# Altium PCB ESP32SSMB V1.4 .PcbDoc (part 1 of 2)
Units mm, origin at the board's own origin, x right, y up, seen from the top; angles counter-clockwise.
Board outline 43.94 x 35.18 mm, 2 copper layers (Top Layer, Bottom Layer), stack 1.671 mm thick; 77 components, 65 nets, 278 pads, 383 vias.
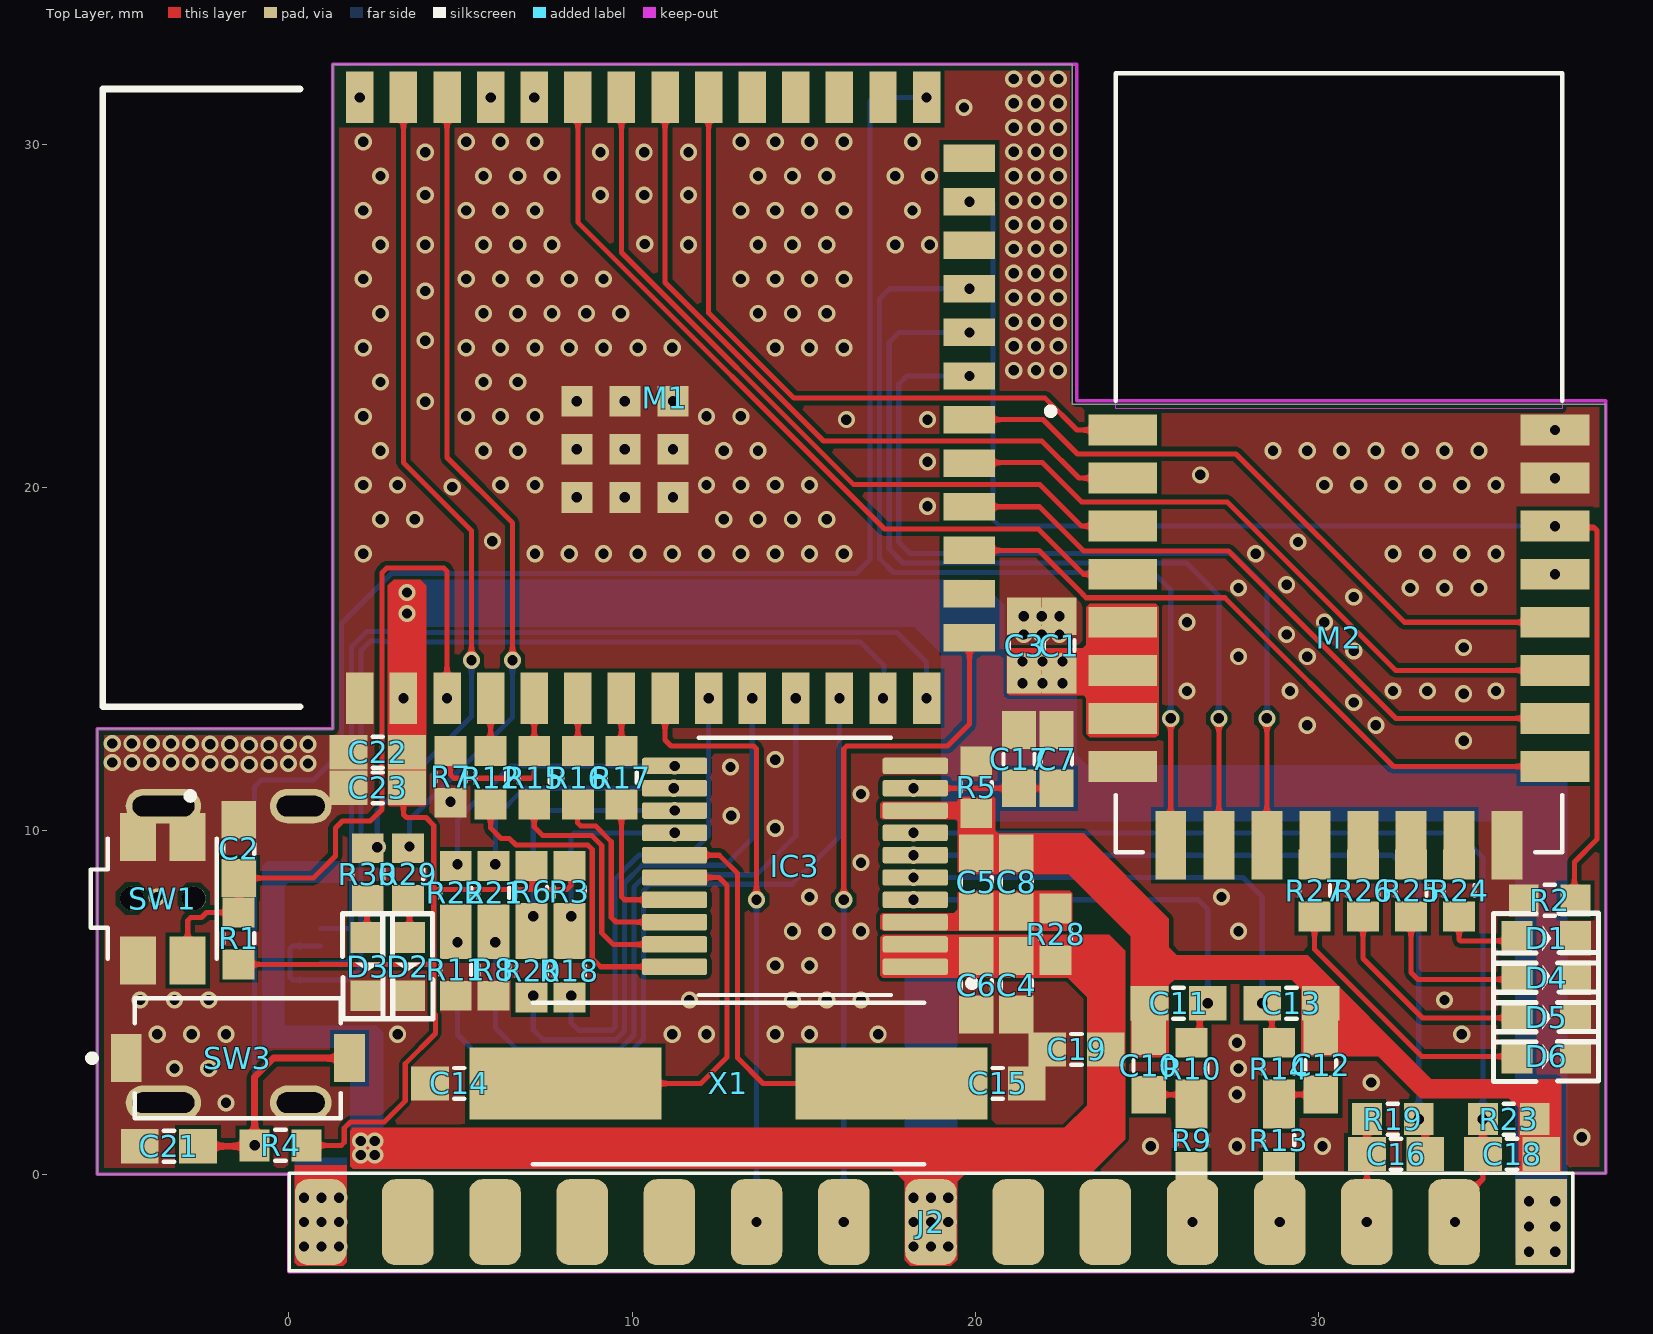
[diagram p0: Top Layer view]
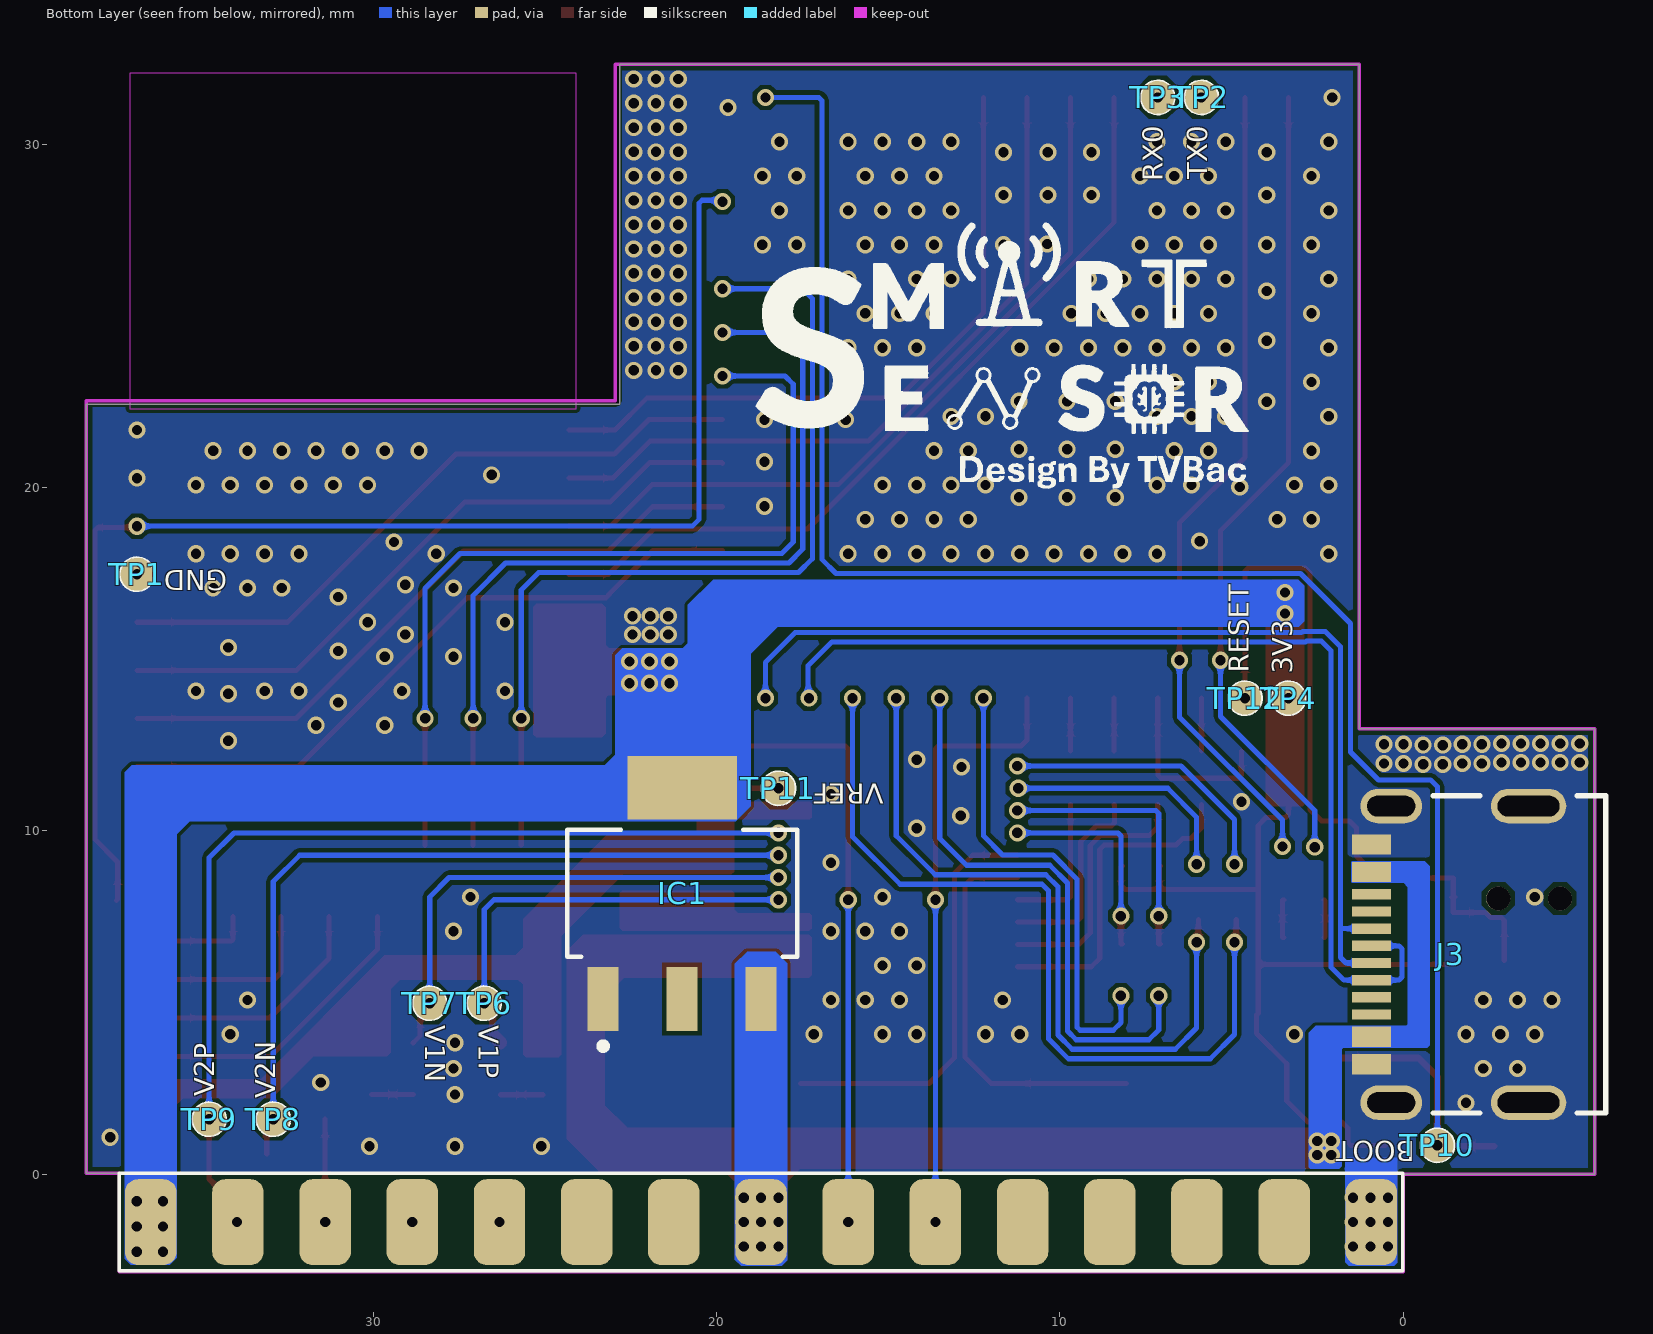
[diagram p1: Bottom Layer view, seen from below]
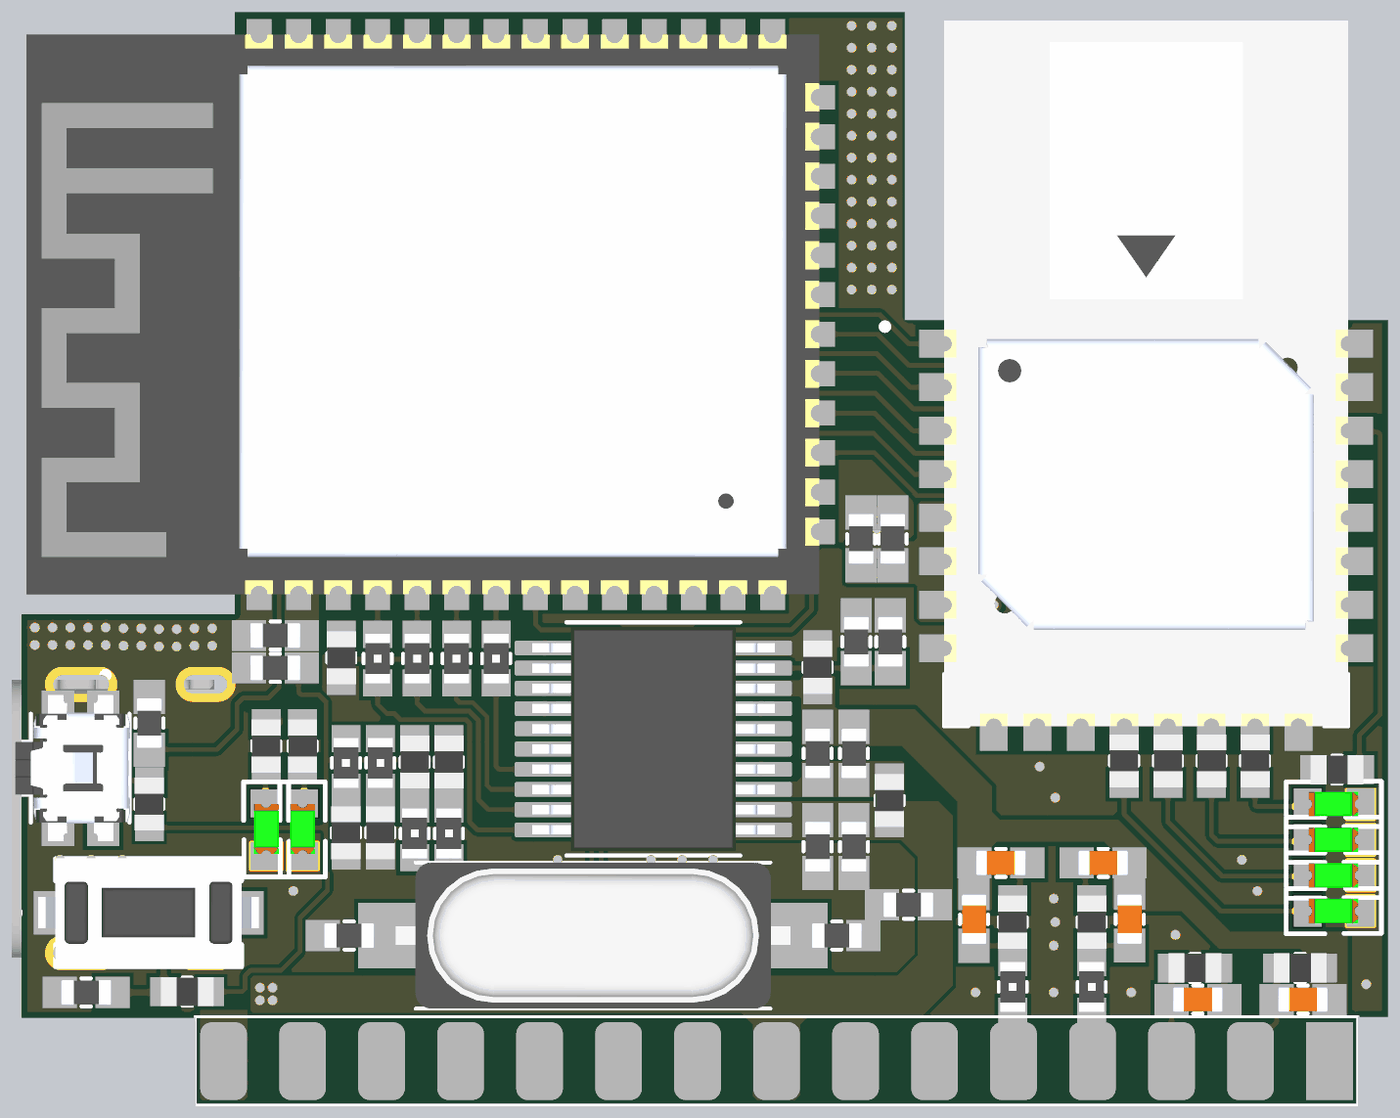
[diagram p2: 3D render of the assembled board from above, using the file's embedded part models]

## Layer stack, top to bottom
Top Solder: solder mask 0.0102, Solder Resist, Dk 3.5
Top Layer: signal copper 0.0356
Dielectric 1: dielectric 1.6, FR-4, Dk 4.3
Bottom Layer: signal copper 0.0356
Bottom Solder: solder mask 0.0102, Solder Resist, Dk 3.5

## Board outline
0.013,-2.845 0.013,0 -5.575,0 -5.575,12.979 1.283,12.979 1.283,32.334 22.823,32.334 22.823,22.432 38.367,22.432 38.367,0.025 37.402,0.025 37.402,-2.845

## Design rules (kind name [scope] priority, off if disabled: settings)
Clearance ClearancePower [InNetClass('POWER')] p1: gap=0.1 ignorepadtopadclearanceinfootprint=FALSE
Clearance [All] p2: gap=0.127 ignorepadtopadclearanceinfootprint=FALSE
ComponentClearance [All] p1: gap=0.1 collisioncheckmode=3 verticalgap=0.1 showdistances=FALSE
DiffPairsRouting [All] p1: maxlimit=2 minlimit=0.1 mostfreqgap=0.2 toplayer_minwidth=0.15 toplayer_maxwidth=2 toplayer_prefwidth=0.2 bottomlayer_minwidth=0.15 bottomlayer_maxwidth=2 bottomlayer_prefwidth=0.2 maxuncoupledlength=12.7
HoleToHoleClearance [All] p1: gap=0 allowstackedmicrovias=TRUE
MinimumSolderMaskSliver [All] p1: minsoldermaskwidth=0
PlaneClearance [All] p1: clearance=0.1
PlaneConnect [All] p1: planeconnectstyle=Direct reliefexpansion=0.508 reliefentries=4 reliefconductorwidth=0.254 reliefairgap=0.254
PolygonConnect [All] p1: connectstyle=Direct reliefconductorwidth=0.254 reliefentries=4 polygonreliefangle="90 Angle" airgapwidth=0.254
RoutingCorners [All] p1: cornerstyle=45-Degree minsetback=1 maxsetback=2
RoutingVias [All] p1: holewidth=0.4 width=0.7 viastyle="Through Hole" minholewidth=0.3 minwidth=0.5 maxholewidth=0.7 maxwidth=1.2
SilkToSilkClearance [All] p1: silktosilkclearance=0
SilkToSolderMaskClearance [IsPad] p1: minsilkscreentomaskgap=0 clearancetoexposedcopper=TRUE
SolderMaskExpansion [All] p1: expansion=0 istentingtop=FALSE
Width [All] p1: maxlimit=2 minlimit=0.15 preferedwidth=0.2
21 further rules are at their usual default settings.

## Classes and differential pairs
net class POWER: 3V3-ESP 5V-ESP
component class UWB: C22 C23 D1 D4 D5 D6 M2 R2 R24 R25 R26 R27
component class Powwer: C19 IC1 J3
component class ESP32: C1 C2 C3 C21 D2 D3 M1 R1 R4 R29 R30 SW1 SW3 TP1 TP2 TP3 TP4 TP10 TP12
component class Connector: J2
component class ADE7753: C4 C5 C6 C7 C8 C10 C11 C12 C13 C14 C15 C16 C17 C18 IC3 R3 R5 R6 R7 R8 R9 R10 R11 R12 R13 R14 R15 R16 R17 R18 R19 R20 R21 R22 R23 R28 TP6 TP7 TP8 TP9 TP11 X1

## Components (designator, comment, footprint, x,y, rotation, side; value= is the part's Value field where it differs from the comment)
C1 "0.1 µF ±10% 10V Ceramic Capacitor X7R 0603 (1608 Metric)" SMD-CAP-0603-YAGEO 22.442,15.399 r270 top value=0.01uF
C2 "10000 pF ±10% 16V Ceramic Capacitor X7R 0603 (1608 Metric)" SMD-CAP-0603-YAGEO -1.46,9.474 r270 top value=0.01uF
C3 "1 µF ±10% 16V Ceramic Capacitor X7R 0603 (1608 Metric)" SMD-CAP-0603-YAGEO 21.426,15.399 r270 top value=1uF
C4 "10 µF ±20% 25V Ceramic Capacitor X5R 0603 (1608 Metric)" SMD-CAP-0603-YAGEO 21.197,5.501 r90 top value=10uF
C5 "10 µF ±20% 25V Ceramic Capacitor X5R 0603 (1608 Metric)" SMD-CAP-0603-YAGEO 20.029,8.501 r270 top value=10uF
C6 "0.1 µF ±10% 16V Ceramic Capacitor X7R 0603 (1608 Metric)" SMD-CAP-0603-YAGEO 20.029,5.501 r90 top value=0.1uF
C7 "10 µF ±20% 25V Ceramic Capacitor X5R 0603 (1608 Metric)" SMD-CAP-0603-YAGEO 22.365,12.091 r270 top value=10uF
C8 "0.1 µF ±10% 16V Ceramic Capacitor X7R 0603 (1608 Metric)" SMD-CAP-0603-YAGEO 21.197,8.501 r270 top value=0.1uF
C10 "0.033 µF ±5% 16V Ceramic Capacitor X7R 0603 (1608 Metric)" SMD-CAP-0603-KEMET 25.058,3.163 r270 top value=33nF
C11 "0.033 µF ±5% 16V Ceramic Capacitor X7R 0603 (1608 Metric)" SMD-CAP-0603-KEMET 25.921,4.978 r0 top value=33nF
C12 "0.033 µF ±5% 16V Ceramic Capacitor X7R 0603 (1608 Metric)" SMD-CAP-0603-KEMET 30.062,3.168 r270 top value=33nF
C13 "0.033 µF ±5% 16V Ceramic Capacitor X7R 0603 (1608 Metric)" SMD-CAP-0603-KEMET 29.212,4.978 r180 top value=33nF
C14 "22 pF ±1% 50V Ceramic Capacitor C0G, NP0 0603 (1608 Metric)" SMD-CAP-0603-YAGEO 4.966,2.642 r0 top value=22pF
C15 "22 pF ±1% 50V Ceramic Capacitor C0G, NP0 0603 (1608 Metric)" SMD-CAP-0603-YAGEO 20.65,2.642 r0 top value=22pF
C16 "0.033 µF ±5% 16V Ceramic Capacitor X7R 0603 (1608 Metric)" SMD-CAP-0603-KEMET 32.258,0.584 r0 top value=33nF
C17 "0.1 µF ±10% 16V Ceramic Capacitor X7R 0603 (1608 Metric)" SMD-CAP-0603-YAGEO 21.273,12.091 r270 top value=0.1uF
C18 "0.033 µF ±5% 16V Ceramic Capacitor X7R 0603 (1608 Metric)" SMD-CAP-0603-KEMET 35.638,0.584 r180 top value=33nF
C19 "0.1 µF ±10% 16V Ceramic Capacitor X7R 0603 (1608 Metric)" SMD-CAP-0603-YAGEO 22.95,3.632 r0 top value=0.1uF
C21 "10000 pF ±10% 16V Ceramic Capacitor X7R 0603 (1608 Metric)" SMD-CAP-0603-YAGEO -3.492,0.813 r0 top value=0.01uF
C22 "1 µF ±10% 16V Ceramic Capacitor X7R 0603 (1608 Metric)" SMD-CAP-0603-YAGEO 2.592,12.294 r0 top value=1uF
C23 "0.1 µF ±10% 10V Ceramic Capacitor X7R 0603 (1608 Metric)" SMD-CAP-0603-YAGEO 2.592,11.252 r0 top value=0.01uF
D1 "0603 GREEN" LED0603_GREEN 36.742,6.871 r0 top
D2 "0603 GREEN" LED0603_GREEN 3.468,5.94 r270 top
D3 "0603 GREEN" LED0603_GREEN 2.299,5.94 r270 top
D4 "0603 GREEN" LED0603_GREEN 36.742,5.724 r0 top
D5 "0603 GREEN" LED0603_GREEN 36.742,4.576 r0 top
D6 "0603 GREEN" LED0603_GREEN 36.742,3.429 r0 top
IC1 "Linear Voltage Regulator IC Positive Fixed 1 Output 1A SOT-223-3" SOT-223-3-DI 21.008,8.18 r90 bottom
IC3 "Single Phase Meter IC 20-SSOP" SSOP-20-ADI 14.746,8.966 r180 top
J2 "HEADER; 15x2PIN; 2.54; HOR;" HEADER-2.54-15X2-HOR-U3D 18.708,-1.397 r180 top
J3 "USB-C (USB TYPE-C) USB 2.0 Receptacle Connector 24 (16+8 Dummy) Position Surface Mount, Right Angle; Through Hole" TYPE-C-HOR-RECEPTACLE-24PIN-MOLEX -2.501,6.401 r90 bottom
M1 "Bluetooth, WiFi 802.11b/g/n, Bluetooth v4.2 +EDR Transceiver Module 2.4GHz ~ 2.5GHz PCB Trace Surface Mount" MODULE-ESP32-S3-WROOM-1-N16R8 7.331,22.616 r90 top
M2 "802.15.4, Bluetooth, Cellular UWB, Zigbee® Transceiver Module 6.25GHz ~ 8.25GHz Integrated, Ceramic Patch Surface Mount" MODULE-DWM3000SR 30.595,20.726 r0 top
R1 "10 kOhms ±1% 0.25W, 1/4W Chip Resistor 0603 (1608 Metric) Automotive AEC-Q200, Pulse Withstanding Thick Film" SMD-RES-0603-SEI -1.46,6.867 r270 top value=10k
R2 "100 kOhms ±5% 0.25W, 1/4W Chip Resistor 0603 (1608 Metric) Automotive AEC-Q200, Pulse Withstanding Thick Film" SMD-RES-0603-SEI 36.732,7.976 r0 top value=100K
R3 "10 kOhms ±1% 0.25W, 1/4W Chip Resistor 0603 (1608 Metric) Automotive AEC-Q200, Pulse Withstanding Thick Film" SMD-RES-0603-SEI 8.174,8.22 r270 top value=10k
R4 "10 kOhms ±1% 0.25W, 1/4W Chip Resistor 0603 (1608 Metric) Automotive AEC-Q200, Pulse Withstanding Thick Film" SMD-RES-0603-SEI -0.241,0.838 r0 top value=10k
R5 "0 Ohms Jumper Chip Resistor 0603 (1608 Metric) Automotive AEC-Q200 Thick Film" SMD-RES-0603-SEI 20.029,11.27 r90 top value=0R
R6 "10 kOhms ±1% 0.25W, 1/4W Chip Resistor 0603 (1608 Metric) Automotive AEC-Q200, Pulse Withstanding Thick Film" SMD-RES-0603-SEI 7.071,8.22 r270 top value=10k
R7 "10 kOhms ±1% 0.25W, 1/4W Chip Resistor 0603 (1608 Metric) Automotive AEC-Q200, Pulse Withstanding Thick Film" SMD-RES-0603-SEI 4.712,11.575 r90 top value=10k
R8 "10 kOhms ±1% 0.25W, 1/4W Chip Resistor 0603 (1608 Metric) Automotive AEC-Q200, Pulse Withstanding Thick Film" SMD-RES-0603-SEI 5.968,5.95 r90 top value=10k
R9 "100 Ohms ±1% 0.1W, 1/10W Chip Resistor 0603 (1608 Metric) Automotive AEC-Q200, High Voltage Thick Film" SMD-RES-0603-RS 26.302,0.991 r90 top value=100R
R10 "1 kOhms ±1% 0.25W, 1/4W Chip Resistor 0603 (1608 Metric) Automotive AEC-Q200, Pulse Withstanding Thick Film" SMD-RES-0603-SEI 26.302,3.073 r90 top value=1K
R11 "10 kOhms ±1% 0.25W, 1/4W Chip Resistor 0603 (1608 Metric) Automotive AEC-Q200, Pulse Withstanding Thick Film" SMD-RES-0603-SEI 4.865,5.95 r90 top value=10k
R12 "100 Ohms ±1% 0.1W, 1/10W Chip Resistor 0603 (1608 Metric) Automotive AEC-Q200, High Voltage Thick Film" SMD-RES-0603-RS 5.881,11.55 r90 top value=100R
R13 "100 Ohms ±1% 0.1W, 1/10W Chip Resistor 0603 (1608 Metric) Automotive AEC-Q200, High Voltage Thick Film" SMD-RES-0603-RS 28.842,0.991 r90 top value=100R
R14 "1 kOhms ±1% 0.25W, 1/4W Chip Resistor 0603 (1608 Metric) Automotive AEC-Q200, Pulse Withstanding Thick Film" SMD-RES-0603-SEI 28.842,3.073 r90 top value=1K
R15 "4.7 kOhms ±1% 0.1W, 1/10W Chip Resistor 0603 (1608 Metric) Anti-Sulfur Thick Film" SMD-RES-0603-RS 7.151,11.55 r90 top value=4.7K
R16 "100 Ohms ±1% 0.1W, 1/10W Chip Resistor 0603 (1608 Metric) Automotive AEC-Q200, High Voltage Thick Film" SMD-RES-0603-RS 8.421,11.55 r90 top value=100R
R17 "100 Ohms ±1% 0.1W, 1/10W Chip Resistor 0603 (1608 Metric) Automotive AEC-Q200, High Voltage Thick Film" SMD-RES-0603-RS 9.691,11.55 r90 top value=100R
R18 "100 Ohms ±1% 0.1W, 1/10W Chip Resistor 0603 (1608 Metric) Automotive AEC-Q200, High Voltage Thick Film" SMD-RES-0603-RS 8.174,5.925 r270 top value=100R
R19 "1 kOhms ±1% 0.25W, 1/4W Chip Resistor 0603 (1608 Metric) Automotive AEC-Q200, Pulse Withstanding Thick Film" SMD-RES-0603-SEI 32.163,1.6 r0 top value=1K
R20 "100 Ohms ±1% 0.1W, 1/10W Chip Resistor 0603 (1608 Metric) Automotive AEC-Q200, High Voltage Thick Film" SMD-RES-0603-RS 7.071,5.925 r270 top value=100R
R21 "4.7 kOhms ±1% 0.1W, 1/10W Chip Resistor 0603 (1608 Metric) Anti-Sulfur Thick Film" SMD-RES-0603-RS 5.968,8.195 r270 top value=4.7K
R22 "4.7 kOhms ±1% 0.1W, 1/10W Chip Resistor 0603 (1608 Metric) Anti-Sulfur Thick Film" SMD-RES-0603-RS 4.865,8.195 r270 top value=4.7K
R23 "1 kOhms ±1% 0.25W, 1/4W Chip Resistor 0603 (1608 Metric) Automotive AEC-Q200, Pulse Withstanding Thick Film" SMD-RES-0603-SEI 35.543,1.6 r180 top value=1K
R24 "1 kOhms ±1% 0.25W, 1/4W Chip Resistor 0603 (1608 Metric) Automotive AEC-Q200, Pulse Withstanding Thick Film" SMD-RES-0603-SEI 34.095,8.261 r270 top value=1K
R25 "1 kOhms ±1% 0.25W, 1/4W Chip Resistor 0603 (1608 Metric) Automotive AEC-Q200, Pulse Withstanding Thick Film" SMD-RES-0603-SEI 32.695,8.261 r270 top value=1K
R26 "1 kOhms ±1% 0.25W, 1/4W Chip Resistor 0603 (1608 Metric) Automotive AEC-Q200, Pulse Withstanding Thick Film" SMD-RES-0603-SEI 31.295,8.261 r270 top value=1K
R27 "1 kOhms ±1% 0.25W, 1/4W Chip Resistor 0603 (1608 Metric) Automotive AEC-Q200, Pulse Withstanding Thick Film" SMD-RES-0603-SEI 29.884,8.261 r270 top value=1K
R28 "0 Ohms Jumper Chip Resistor 0603 (1608 Metric) Automotive AEC-Q200 Thick Film" SMD-RES-0603-SEI 22.34,6.985 r270 top value=0R
R29 "1 kOhms ±1% 0.25W, 1/4W Chip Resistor 0603 (1608 Metric) Automotive AEC-Q200, Pulse Withstanding Thick Film" SMD-RES-0603-SEI 3.468,8.738 r270 top value=1K
R30 "1 kOhms ±1% 0.25W, 1/4W Chip Resistor 0603 (1608 Metric) Automotive AEC-Q200, Pulse Withstanding Thick Film" SMD-RES-0603-SEI 2.299,8.738 r270 top value=1K
SW1 "https://www.digikey.com/en/products/detail/panasonic-electronic-components/EVQ-P7L01P/4429453" SW-HxLxW-1.1x3.5x2.9-PEC -3.67,8.026 r270 top
SW3 "Tactile Switch SPST-NO Top Actuated Surface Mount" SW-HXLXW-5.0X6.0X3.5-C&K -1.484,3.378 r0 top
TP1 "Test Point" TEST_POINT 36.89,17.476 r90 bottom
TP2 "Test Point" TEST_POINT 5.881,31.366 r90 bottom
TP3 "Test Point" TEST_POINT 7.151,31.366 r90 bottom
TP4 "Test Point" TEST_POINT 3.341,13.866 r90 bottom
TP6 "Test Point" TEST_POINT 26.771,4.978 r90 bottom
TP7 "Test Point" TEST_POINT 28.362,4.978 r90 bottom
TP8 "Test Point" TEST_POINT 32.918,1.6 r90 bottom
TP9 "Test Point" TEST_POINT 34.786,1.6 r90 bottom
TP10 "Test Point" TEST_POINT -0.996,0.838 r90 bottom
TP11 "Test Point" TEST_POINT 18.2,11.241 r90 bottom
TP12 "Test Point" TEST_POINT 4.611,13.866 r90 bottom
X1 "3.579545 MHz ±20ppm Crystal 18pF 180 Ohms HC-49/US" SMD-HC-49/US-ALLC 12.808,2.642 r0 top value=3.58M

## Footprints (in the part's own frame and the unit in brackets; to place one, negate y for a bottom-side part, rotate by r counter-clockwise, add the part's x,y. Pads: shape width x height; smd on the part's side, far side on the other; paste and mask are expansions set on the pad)
HEADER-2.54-15X2-HOR-U3D [mm]
  rect 1.5x2.5 smd: 01(-17.78,0)
  rrect50% 1.5x2.5 smd far side: 02(-17.78,0) 04(-15.24,0) 06(-12.7,0) 08(-10.16,0) 10(-7.62,0) 12(-5.08,0) 14(-2.54,0) 16(0,0) 18(2.54,0) 20(5.08,0) 22(7.62,0) 24(10.16,0) 26(12.7,0) 28(15.24,0) 30(17.78,0)
  rrect50% 1.5x2.5 smd: 03(-15.24,0) 05(-12.7,0) 07(-10.16,0) 09(-7.62,0) 11(-5.08,0) 13(-2.54,0) 15(0,0) 17(2.54,0) 19(5.08,0) 21(7.62,0) 23(10.16,0) 25(12.7,0) 27(15.24,0) 29(17.78,0)
  Top Layer pour cut-out: -18.694,1.422 -18.694,-1.422 18.694,-1.422 18.694,1.422
  Bottom Layer pour cut-out: -18.669,1.422 -18.669,-1.422 18.72,-1.422 18.72,1.422
  silkscreen extent -18.69,-1.42 18.69,1.42
LED0603_GREEN [mm]
  rect 0.9x1 smd paste+0 mask+0.051: 1(-0.955,0) 2(0.745,0)
  silkscreen extent -1.65,-0.73 1.41,0.73, body extent -0.93,-0.4 0.67,0.4, height 0.53
MODULE-DWM3000SR [mm]
  rect 2x0.9 smd: 1(-6.295,0.95) 2(-6.295,-0.45) 3(-6.295,-1.85) 4(-6.295,-3.25) 5(-6.295,-4.65) 6(-6.295,-6.05) 7(-6.295,-7.45) 8(-6.295,-8.85) 17(6.295,-8.85) 18(6.295,-7.45) 19(6.295,-6.05) 20(6.295,-4.65) 21(6.295,-3.25) 22(6.295,-1.85) 23(6.295,-0.45) 24(6.295,0.95)
  rect 0.9x2 smd: 9(-4.9,-11.145) 10(-3.5,-11.145) 11(-2.1,-11.145) 12(-0.7,-11.145) 13(0.7,-11.145) 14(2.1,-11.145) 15(3.5,-11.145) 16(4.9,-11.145)
  Keep-Out Layer region: 6.5,1.575 -6.5,1.575 -6.5,11.35 6.5,11.35
  Keep-Out Layer region: 6.5,1.575 -6.5,1.575 -6.5,11.35 6.5,11.35
  silkscreen extent -8.5,-11.35 6.5,11.35, body extent -6.5,-11.35 6.5,11.35, height 2.89
MODULE-ESP32-S3-WROOM-1-N16R8 [mm]
  rect 1.5x0.8 smd: 1(-8.75,5.26) 2(-8.75,3.99) 3(-8.75,2.72) 4(-8.75,1.45) 5(-8.75,0.18) 6(-8.75,-1.09) 7(-8.75,-2.36) 8(-8.75,-3.63) 9(-8.75,-4.9) 10(-8.75,-6.17) 11(-8.75,-7.44) 12(-8.75,-8.71) 13(-8.75,-9.98) 14(-8.75,-11.25) 27(8.75,-11.25) 28(8.75,-9.98) 29(8.75,-8.71) 30(8.75,-7.44) 31(8.75,-6.17) 32(8.75,-4.9) 33(8.75,-3.63) 34(8.75,-2.36) 35(8.75,-1.09) 36(8.75,0.18) 37(8.75,1.45) 38(8.75,2.72) 39(8.75,3.99) 40(8.75,5.26)
  rect 0.8x1.5 smd: 15(-6.985,-12.5) 16(-5.715,-12.5) 17(-4.445,-12.5) 18(-3.175,-12.5) 19(-1.905,-12.5) 20(-0.635,-12.5) 21(0.635,-12.5) 22(1.905,-12.5) 23(3.175,-12.5) 24(4.445,-12.5) 25(5.715,-12.5) 26(6.985,-12.5)
  rect 0.9x0.9 smd: 41(-1.5,-2.46) 42(-1.5,-1.06) 43(-2.9,-1.06) 44(-2.9,-2.46) 45(-2.9,-3.86) 46(-1.5,-3.86) 47(-0.1,-3.86) 48(-0.1,-2.46) 49(-0.1,-1.06)
  silkscreen extent -10.1,5.35 9,12.75, body extent -9,-12.75 9,12.75, height 3.25
SMD-CAP-0603-KEMET [mm]
  rect 1.1x1 smd: 1(-0.85,0) 2(0.85,0)
  silkscreen extent -0.15,-0.45 0.15,0.45, body extent -0.8,-0.4 0.8,0.4, height 0.87
SMD-CAP-0603-YAGEO [mm]
  rect 1.1x1 smd: 1(-0.85,0) 2(0.85,0)
  silkscreen extent -0.15,-0.45 0.15,0.45, body extent -0.8,-0.4 0.8,0.4, height 0.9
SMD-HC-49/US-ALLC [mm]
  rect 5.6x2.1 smd: 1(-4.75,0) 2(4.75,0)
  silkscreen extent -5.7,-2.35 5.7,2.35, body extent -6.35,-2.35 6.35,2.35, height 4.06
SMD-RES-0603-RS [mm]
  rect 0.87x0.93 smd: 1(-0.78,0) 2(0.78,0)
  silkscreen extent -0.15,-0.45 0.15,0.45, body extent -0.8,-0.4 0.8,0.4, height 0.55
SMD-RES-0603-SEI [mm]
  rect 0.87x0.93 smd: 1(-0.755,0) 2(0.755,0)
  silkscreen extent -0.15,-0.45 0.15,0.45, body extent -0.85,-0.47 0.85,0.47, height 0.56
SOT-223-3-DI [mm]
  rect 1.86x0.9 smd: 1(-3.075,2.3) 2(-3.075,0) 3(-3.075,-2.3)
  rect 1.86x3.19 smd: 4(3.075,0)
  silkscreen extent -4.55,-3.35 1.85,3.35, body extent -3.5,-3.25 3.5,3.25, height 1.65
SSOP-20-ADI [mm]
  rrect25% 1.9x0.48 smd: 1(-3.505,2.925) 2(-3.505,2.275) 3(-3.505,1.625) 4(-3.505,0.975) 5(-3.505,0.325) 6(-3.505,-0.325) 7(-3.505,-0.975) 8(-3.505,-1.625) 9(-3.505,-2.275) 10(-3.505,-2.925) 11(3.505,-2.925) 12(3.505,-2.275) 13(3.505,-1.625) 14(3.505,-0.975) 15(3.505,-0.325) 16(3.505,0.325) 17(3.505,0.975) 18(3.505,1.625) 19(3.505,2.275) 20(3.505,2.925)
  silkscreen extent -5.26,-3.75 2.8,3.75, body extent -3.9,-3.6 3.9,3.6, height 2
SW-HxLxW-1.1x3.5x2.9-PEC [mm]
  rect 1.4x1.05 smd: 11(-1.8,0.725) 12(1.8,0.725) 21(-1.8,-0.725) 22(1.8,-0.725)
  round 0.7 hole 0.7 unplated: ""(0,0.9) ""(0,-0.9)
  silkscreen extent -3.09,-2.1 1.75,1.57, body extent -2.35,-2.1 2.35,1.59, height 1.5
SW-HXLXW-5.0X6.0X3.5-C&K [mm]
  rect 0.9x1.4 smd: 1(-3.25,0) 2(3.25,0)
  silkscreen extent -4.35,-1.75 3,1.75, body extent -3.55,-1.75 3.55,1.75, height 4.3
TEST_POINT [mm]
  round 1 smd: 1(0,0)
  silkscreen extent -0.5,-0.5 0.5,0.5
TYPE-C-HOR-RECEPTACLE-24PIN-MOLEX [mm]
  rect 0.59x1.15 smd mask+0.064: A1B12(-3.2,3.425) A4B9(-2.4,3.425) B1A12(3.2,3.425) B4A9(2.4,3.425)
  rect 0.298x1.15 smd mask+0.064: A5(-1.25,3.425) A6(-0.25,3.425) A7(0.25,3.425) A8(1.25,3.425) B5(1.75,3.425) B6(0.75,3.425) B7(-0.75,3.425) B8(-1.75,3.425)
  oval 1x2.2 hole 0.6 slot 1.8 at 90 deg mask+0.064: SHIELD(-4.32,-1.15) SHIELD(4.32,-1.15)
  oval 1x1.8 hole 0.6 slot 1.4 at 90 deg mask+0.064: SHIELD(-4.32,2.85) SHIELD(4.32,2.85)
  silkscreen extent -4.62,-3.4 4.62,1.63, body extent -4.47,-3.38 4.47,3.38, height 3.17

## Part data
C1 C23: library part "CAP; 0.1uF; 10V; 0603; SMD; CC0603KRX7R6BB104", "Multilayer Ceramic Capacitor, 0.1 uF, 10 V, ± 10%, X7R, 0603 [1608 Metric]", Manufacturer=Yageo, Manufacturer Part Number=CC0603KRX7R6BB104, Supplier Part Number=311-4055-1-ND, Category="Ceramic Capacitors", ComponentLink1Description=https://datasheet.ciiva.com/11586/upy-gphc-x7r-6-3v-to-50v-8-11586327.pdf?src-supplier=Avnet, ComponentLink1URL=https://datasheet.ciiva.com/11586/upy-gphc-x7r-6-3v-to-50v-8-11586327.pdf?src-supplier=Avnet, ComponentLink2Description="Link Digikey", ComponentLink2URL=https://www.digikey.com/en/products/detail/yageo/CC0603KRX7R6BB104/5883741, Designer=TVBac, Halogen Free=5694HalogenFree, Lead Free=5697LeadFree, Material=4241ConductorMaterial, Pricing="1=0.1, 10=0.067, 50=0.0398, 100=0.0314, 500=0.02316, 1000=0.01918, 4000=0.01633, 8000=0.01519, 12000=0.01443, 28000=0.01367, 100000=0.01035, 200000=0.0101, 400000=0.00949 (USD)", RoHS=Yes, Stock=113177, Supplier=Digikey
C2 C21: library part "CAP; 0.01uF; 16V; 0603; SMD; CC0603KRX7R7BB103", "Multilayer Ceramic Capacitor, 0.01 uF, 16 V, ± 10%, X7R, 0603 [1608 Metric]", Manufacturer=Yageo, Manufacturer Part Number=CC0603KRX7R7BB103, Package=0603, Supplier Part Number=311-3369-1-ND, Category="Ceramic Capacitors", ComponentLink1Description=https://datasheet.ciiva.com/7978/1489800-7978139.pdf?src-supplier=Element14, ComponentLink1URL=https://datasheet.ciiva.com/7978/1489800-7978139.pdf?src-supplier=Element14, ComponentLink2Description="Link Digikey", ComponentLink2URL=https://www.digikey.com/en/products/detail/yageo/CC0603KRX7R7BB103/5883753, Designer=TVBac, Lead Free=5697LeadFree, Material=4241ConductorMaterial, Pricing="1=0.1, 10=0.041, 50=0.0236, 100=0.0183, 500=0.01378, 1000=0.01083 (USD)", RoHS=Yes, Stock=24661, Supplier=Digikey
C3 C22: library part "CAP; 1uF; 16V; 0603; SMD; CC0603KRX7R7BB105", "0603 1 uF 16 V ±10 % Tolerance X7R SMT Multilayer Ceramic Capacitor", Case Code (Imperial)=0603, Case Code (Metric)=1608, Dielectric=X7R, Manufacturer=Yageo, Manufacturer Part Number=CC0603KRX7R7BB105, Max Operating Temperature=125°C, Min Operating Temperature=-55°C, Package Quantity=1, Supplier Part Number=311-1446-1-ND, Tolerance=10%, Voltage=16V, Case/Package=0603, Category="Ceramic Capacitors", ComponentLink1Description=https://datasheet.ciiva.com/8033/1734573-8033801.pdf?src-supplier=Element14, ComponentLink1URL=https://datasheet.ciiva.com/8033/1734573-8033801.pdf?src-supplier=Element14, ComponentLink2Description=https://datasheet.ciiva.com/8033/1734573-8033800.pdf?src-supplier=Element14, ComponentLink2URL=https://datasheet.ciiva.com/8033/1734573-8033800.pdf?src-supplier=Element14, ComponentLink3Description=https://datasheet.ciiva.com/7978/1489800-7978143.pdf?src-supplier=Element14, ComponentLink3URL=https://datasheet.ciiva.com/7978/1489800-7978143.pdf?src-supplier=Element14, ComponentLink4Description=https://datasheet.ciiva.com/28450/1489800-28450557.pdf?src-supplier=Element14, ComponentLink4URL=https://datasheet.ciiva.com/28450/1489800-28450557.pdf?src-supplier=Element14, ComponentLink5Description=https://datasheet.ciiva.com/176/mlccorderingcode-176789.pdf?src-supplier=Digikey, ComponentLink5URL=https://datasheet.ciiva.com/176/mlccorderingcode-176789.pdf?src-supplier=Digikey, ComponentLink6Description=https://datasheet.ciiva.com/176/mlccorderingcode-176788.pdf?src-supplier=Digikey, ComponentLink6URL=https://datasheet.ciiva.com/176/mlccorderingcode-176788.pdf?src-supplier=Digikey, ComponentLink7Description=https://datasheet.ciiva.com/176/mlccorderingcode-176790.pdf?src-supplier=Digikey, ComponentLink7URL=https://datasheet.ciiva.com/176/mlccorderingcode-176790.pdf?src-supplier=Digikey, ComponentLink8Description=https://datasheet.ciiva.com/5425/upy-gphc-x7r-6-3v-to-50v-8-12304-5425495.pdf?src-supplier=Mouser, ComponentLink8URL=https://datasheet.ciiva.com/5425/upy-gphc-x7r-6-3v-to-50v-8-12304-5425495.pdf?src-supplier=Mouser, ComponentLink9Description="Link Digikey", ComponentLink9URL=https://www.digikey.com/en/products/detail/yageo/CC0603KRX7R7BB105/2833611?s=N4IgTCBcDaIMJwAwDZEGYDSAlAGgdizwCEiBGRAVhAF0BfIA, Construction=Flat, Depth=0.8mm, Designer=TVBac, Dissipation Factor=5%, Halogen Free=5694HalogenFree, Height=0.8mm, Lead Free=5697LeadFree, Length=1.6mm, Material=4241ConductorMaterial, Mounting Technology="Surface Mount", Packaging="Tape and Reel", Pins=2, Pricing="1=0.1, 10=0.066, 50=0.0392, 100=0.0308, 500=0.02274, 1000=0.01882, 4000=0.01785, 8000=0.01626, 12000=0.01545, 20000=0.01456, 28000=0.01404, 40000=0.01353, 100000=0.01313 (USD)", Radiation Hardening=No, Reach SVHC Compliant=Unknown, RoHS=Yes, RoHS Compliant=Yes, Series=CC, Stock=9165861, Supplier=Digikey, Termination=SMD/SMT, Thickness=0.035inch, Voltage Rating=16V, Voltage Rating (DC)=16V, Width=0.031inch
C4 C5 C7: library part "CAP; 10uF; 25V; SMD; 0603; CC0603MRX5R8BB106", "Multilayer Ceramic Capacitor, 10 uF, 25 V, ï¿½ 20%, X5R, 0603 [1608 Metric]", Case Code (Imperial)=0603, Case Code (Metric)=1608, Dielectric=X5R, Manufacturer=Yageo, Manufacturer Part Number=CC0603MRX5R8BB106, Max Operating Temperature=85°C, Min Operating Temperature=-55°C, Supplier Part Number=3086968, Tolerance=20%, Voltage Rating=25V, Case/Package=0603, Category="Ceramic Capacitors", ComponentLink1Description=https://www.yageo.com/upload/media/product/productsearch/datasheet/mlcc/UPY-GPHC_X5R_4V-to-50V_26.pdf?src-supplier=Digikey, ComponentLink1URL=https://www.yageo.com/upload/media/product/productsearch/datasheet/mlcc/UPY-GPHC_X5R_4V-to-50V_26.pdf?src-supplier=Digikey, ComponentLink2Description=https://datasheet.octopart.com/CC0603MRX5R8BB106-Yageo-datasheet-182965619.pdf?src-supplier=Farnell, ComponentLink2URL=https://datasheet.octopart.com/CC0603MRX5R8BB106-Yageo-datasheet-182965619.pdf?src-supplier=Farnell, ComponentLink3Description="Link Digikey", ComponentLink3URL=https://www.digikey.com/en/products/detail/yageo/CC0603MRX5R8BB106/7164378, Designer=TVBac, Halogen Free="Halogen Free", Lead Free="Lead Free", Mounting Technology="Surface Mount", Package=0603, Packaging="Cut Tape", Pricing="4000=0.155, 8000=0.153, 12000=0.151 (USD)", RoHS=Yes, RoHS Compliant=Yes, Series=CC, Stock=296000, Supplier="Future Electronics", Voltage Rating (DC)=25V
C6 C8 C17 C19: library part "CAP; 0.1uF; 16V; 0603; SMD; CC0603KRX7R7BB104", "0603 0.1 uF 16 V ±10 % Tolerance X7R SMT Multilayer Ceramic Capacitor", Case Code (Imperial)=0603, Case Code (Metric)=1608, Dielectric=X7R, Insulation Resistance=100GR, Manufacturer=Yageo, Manufacturer Part Number=CC0603KRX7R7BB104, Max Operating Temperature=125°C, Min Operating Temperature=-55°C, Package Quantity=1, Supplier Part Number=311-1088-1-ND, Tolerance=10%, Voltage=16V, Case/Package=0603, Category="Ceramic Capacitors", ComponentLink1Description=https://datasheet.ciiva.com/11786/0900766b80d84f1d-11786077.pdf?src-supplier=Rs, ComponentLink1URL=https://datasheet.ciiva.com/11786/0900766b80d84f1d-11786077.pdf?src-supplier=Rs, ComponentLink2Description=https://datasheet.ciiva.com/8033/70765-8033799.pdf?src-supplier=Element14, ComponentLink2URL=https://datasheet.ciiva.com/8033/70765-8033799.pdf?src-supplier=Element14, ComponentLink3Description=https://datasheet.ciiva.com/7978/1489800-7978141.pdf?src-supplier=Element14, ComponentLink3URL=https://datasheet.ciiva.com/7978/1489800-7978141.pdf?src-supplier=Element14, ComponentLink4Description=https://datasheet.ciiva.com/28450/1489800-28450552.pdf?src-supplier=Element14, ComponentLink4URL=https://datasheet.ciiva.com/28450/1489800-28450552.pdf?src-supplier=Element14, ComponentLink5Description=https://datasheet.ciiva.com/46430/1734573-46430156.pdf?src-supplier=Element14, ComponentLink5URL=https://datasheet.ciiva.com/46430/1734573-46430156.pdf?src-supplier=Element14, ComponentLink6Description=https://datasheet.ciiva.com/144/mlccorderingcode-144183.pdf?src-supplier=Digikey, ComponentLink6URL=https://datasheet.ciiva.com/144/mlccorderingcode-144183.pdf?src-supplier=Digikey, ComponentLink7Description=https://datasheet.ciiva.com/144/mlccorderingcode-144182.pdf?src-supplier=Digikey, ComponentLink7URL=https://datasheet.ciiva.com/144/mlccorderingcode-144182.pdf?src-supplier=Digikey, ComponentLink8Description=https://datasheet.ciiva.com/144/mlccorderingcode-144184.pdf?src-supplier=Digikey, ComponentLink8URL=https://datasheet.ciiva.com/144/mlccorderingcode-144184.pdf?src-supplier=Digikey, ComponentLink9Description=https://datasheet.ciiva.com/8033/1734573-8033797.pdf?src-supplier=Element14, ComponentLink9URL=https://datasheet.ciiva.com/8033/1734573-8033797.pdf?src-supplier=Element14, ComponentLink10Description=https://datasheet.ciiva.com/13395/upy-gphc-x7r-6-3v-to-50v-8-13395674.pdf?src-supplier=Mouser, ComponentLink10URL=https://datasheet.ciiva.com/13395/upy-gphc-x7r-6-3v-to-50v-8-13395674.pdf?src-supplier=Mouser, ComponentLink11Description=https://datasheet.ciiva.com/11464/upy-gphc-x7r-6-3v-to-50v-8-11464735.pdf?src-supplier=Avnet, ComponentLink11URL=https://datasheet.ciiva.com/11464/upy-gphc-x7r-6-3v-to-50v-8-11464735.pdf?src-supplier=Avnet, ComponentLink12Description=https://datasheet.ciiva.com/15165/getdatasheetpartid-63554-15165387.pdf?src-supplier=Verical, ComponentLink12URL=https://datasheet.ciiva.com/15165/getdatasheetpartid-63554-15165387.pdf?src-supplier=Verical, ComponentLink13Description="Link Digikey", ComponentLink13URL=https://www.digikey.com/en/products/detail/yageo/CC0603KRX7R7BB104/302822, Depth=0.8mm, Designer=TVBac, Halogen Free="Halogen Free", Height=0.8mm, Lead Free="Lead Free", Length=1.6mm, Material=Ceramic, Mounting Technology="Surface Mount", Packaging="Tape and Reel", Pins=2, Pricing="1=0.1, 10=0.042, 50=0.0238, 100=0.0185, 500=0.01392, 1000=0.01094, 4000=0.00915, 8000=0.00836, 12000=0.00796, 28000=0.00756, 100000=0.00547, 200000=0.00529, 400000=0.00497 (USD)", Radiation Hardening=No, Reach SVHC Compliant=No, RoHS=Yes, RoHS Compliant=Yes, Series=CC, Stock=8705780, Supplier=Digikey, Termination=SMD/SMT, Thickness=0.035inch, Voltage Rating=16V, Voltage Rating (DC)=16V, Width=0.031inch
  C19: Package=0603
C10 C11 C12 C13 C16 C18: library part "CAP; 0.033uF; 33nF; 0603; 16V; C0603C333J4REC7411", "Multilayer Ceramic Capacitors MLCC - SMD/SMT 16V 0.033uF X7R 0603 5%", Manufacturer=KEMET, Manufacturer Part Number=C0603C333J4REC7411, Supplier Part Number=80-C0603C333J4RECLR, Category="Ceramic Capacitors", ComponentLink1Description=https://api.kemet.com/component-edge/download/datasheet/C0603C333J4REC7411.pdf?src-supplier=Digikey, ComponentLink1URL=https://api.kemet.com/component-edge/download/datasheet/C0603C333J4REC7411.pdf?src-supplier=Digikey, ComponentLink2Description="Link Digikey", ComponentLink2URL=https://www.digikey.com/en/products/detail/kemet/C0603C333J4REC7411/8645086, Designer=TVBac, Pricing="1=0.13, 10=0.057, 50=0.057, 100=0.033, 1000=0.025, 2500=0.022, 10000=0.02, 15000=0.018, 45000=0.017, 90000=0.014 (USD)", RoHS=Yes, Stock=17910, Supplier=Mouser
C14 C15: library part "CAP; 22pF; 50V; SMD; CC0603FRNPO9BN220", "Multilayer Ceramic Capacitor, 22 pF, 50 V, ï¿½ 1%, C0G (NP0), 0603 [1608 Metric]", Manufacturer=Yageo, Manufacturer Part Number=CC0603FRNPO9BN220, Supplier Part Number=1000074, Category="Ceramic Capacitors", ComponentLink1Description=https://datasheet.ciiva.com/13211/upy-gp-np0-16v-to-50v-8-13211061.pdf?src-supplier=Mouser, ComponentLink1URL=https://datasheet.ciiva.com/13211/upy-gp-np0-16v-to-50v-8-13211061.pdf?src-supplier=Mouser, ComponentLink2Description="Link Digikey", ComponentLink2URL=https://www.digikey.com/en/products/detail/yageo/CC0603FRNPO9BN220/5883497, Designer=TVBac, Halogen Free=5694HalogenFree, Lead Free=5697LeadFree, Pricing="4000=0.0159, 12000=0.0156, 20000=0.0154, 80000=0.0149, 120000=0.0147 (USD)", RoHS=Yes, Stock=144000, Supplier="Future Electronics"
D1 D2 D3 D4 D5 D6: library part L0603_GREEN, "225mcd~450mcd Colorless Transparent Lens -40℃~+85℃ Positive Stick 520nm~535nm Green 120° 70mW 2.4V~3V 0603 LED Indication - Discrete ROHS", Manufacture Part Number=A-SP192DGHC-C01-4T, Manufacturer=Amicc, Package=0603, Link=https://www.lcsc.com/product-detail/LED-Indication-Discrete_Amicc-A-SP192DGHC-C01-4T_C19171301.html?s_z=n_LED%200603%20green, Packaging="Cut Tape (CT)"
IC1: library part "LDO; 3V3; 1A; SMD; AZ1117EH-3.3TRG1", "Linear Voltage Regulator IC 1 Output 1A SOT-223", Package="SOT-223 Diodes Inc.", Availability=Unavailable, ComponentLink1Description="Link Digikey", ComponentLink1URL=https://www.digikey.com/en/products/detail/diodes-incorporated/AZ1117EH-3-3TRG1/5001329, Designer=TVBac, MF="Diodes Inc.", MP=AZ1117EH-3.3TRG1, Price=None, SnapEDA_Link=https://www.snapeda.com/parts/AZ1117EH-3.3TRG1/Diodes%20Inc./view-part/482930/?ref=snap
IC3: library part ADE7753ARSZ, "Single Phase Multifunction Metering IC 20-Pin SSOP Tube", Manufacturer="Analog Devices", Supplier Part Number=584-ADE7753ARSZ, Category="Analog to Digital Converters (ADCs)", ComponentLink1Description=https://datasheet.ciiva.com/15373/ade7753-249340-15373717.pdf?src-supplier=Mouser, ComponentLink1URL=https://datasheet.ciiva.com/15373/ade7753-249340-15373717.pdf?src-supplier=Mouser, ComponentLink2Description=https://datasheet.ciiva.com/1166/1610806-1166771.pdf?src-supplier=Element14, ComponentLink2URL=https://datasheet.ciiva.com/1166/1610806-1166771.pdf?src-supplier=Element14, ComponentLink3Description=https://datasheet.ciiva.com/15134/getdatasheetpartid-132040-15134272.pdf?src-supplier=Verical, ComponentLink3URL=https://datasheet.ciiva.com/15134/getdatasheetpartid-132040-15134272.pdf?src-supplier=Verical, ComponentLink4Description=https://datasheet.ciiva.com/1941/ade7753-1941429.pdf?src-supplier=Digikey, ComponentLink4URL=https://datasheet.ciiva.com/1941/ade7753-1941429.pdf?src-supplier=Digikey, ComponentLink5Description=https://datasheet.ciiva.com/22621/1610806-22621637.pdf?src-supplier=Element14, ComponentLink5URL=https://datasheet.ciiva.com/22621/1610806-22621637.pdf?src-supplier=Element14, ComponentLink6Description=https://datasheet.ciiva.com/3148/ade7753-3148700.pdf?src-supplier=Avnet, ComponentLink6URL=https://datasheet.ciiva.com/3148/ade7753-3148700.pdf?src-supplier=Avnet, ComponentLink7Description=https://datasheet.ciiva.com/1168/1610806-1168083.pdf?src-supplier=Element14, ComponentLink7URL=https://datasheet.ciiva.com/1168/1610806-1168083.pdf?src-supplier=Element14, ComponentLink8Description=https://datasheet.ciiva.com/5697/ade7753-5697029.pdf?src-supplier=Farnell, ComponentLink8URL=https://datasheet.ciiva.com/5697/ade7753-5697029.pdf?src-supplier=Farnell, ComponentLink9Description=https://datasheet.ciiva.com/48694/001249930-da-01-en-ic-energy-meteri-ade7753arsz-ssop-20-adi-48694326.pdf?src-supplier=Conrad, ComponentLink9URL=https://datasheet.ciiva.com/48694/001249930-da-01-en-ic-energy-meteri-ade7753arsz-ssop-20-adi-48694326.pdf?src-supplier=Conrad, ComponentLink10Description="Link Digikey", ComponentLink10URL=https://www.digikey.com/en/products/detail/analog-devices-inc/ADE7753ARSZ/671181, Designer=TVBac, Manufacturer Part Number=ADE7753ARSZ, Pricing="1=7.3, 10=5.71, 50=5.04, 100=3.91, 1000=3.51, 10000=3.37 (USD)", RoHS=Yes, Stock=239, Supplier=Mouser
J3: library part "Type-C; USB; HOR; RECEPTACLE;  24PIN; 217179-0001", "USB Connector, 16 Contact(s), Female, Right Angle, Surface Mount Terminal, Locking, Receptacle", Current Rating=1.25A, Manufacturer=Molex, Manufacturer Part Number=217179-0001, Max Operating Temperature=85°C, Min Operating Temperature=-40°C, Supplier Part Number=35AJ1973, Voltage Rating=30V, Category=Connectors, ComponentLink1Description="Link Digikey", ComponentLink1URL=https://www.digikey.com/en/products/detail/molex/2171790001/13913749, Contact Material=Nickel,Gold, Designer=TVBac, Gender=Receptacle, Height=3.36mm, Number of Contacts=16, Pricing="1=1.02, 25=0.853, 100=0.722, 250=0.677, 500=0.631 (USD)", RoHS=No, Stock=7200, Supplier=Avnet, USB Standard="USB 2.0"
M1: library part "ESP32-S3-WROOM-1-N16R8; SMD;", "SMD mod, ESP32-S3R8 with 3.3V, 8MB Octal PSRAM die insid, 6MBQuad SPI flash, pcb ant", Manufacturer="Espressif Systems", Manufacturer Part Number=ESP32-S3-WROOM-1-N16R8, Supplier Part Number=1965-ESP32-S3-WROOM-1-N16R8CT-ND, Category=LDO, ComponentLink1Description="Link Digikey", ComponentLink1URL=https://www.digikey.com/en/products/detail/espressif-systems/ESP32-S3-WROOM-1-N16R8/16162642, Designer=TVBac, Pricing="1=3.9 (USD)", RoHS=No, Stock=8003, Supplier=Digikey
M2: library part DWM3000TR13, "RF Modules UWB XCVR Module", Clock Frequency=7.9872GHz, Manufacturer=Qorvo, Max Operating Temperature=85°C, Max Supply Voltage=3.6V, Min Operating Temperature=-30°C, Min Supply Voltage=1.62V, Supplier Part Number=772-DWM3000TR13, Bandwidth=1.4976GHz, Category="RF Receivers, Transceivers", Data Rate=6.8Mbps, Height=2.9mm, Interface=SPI, Manufacturer Part Number=DWM3000TR13, Number of GPIO=9, Pricing="1=23.62, 10=23.62, 50=20.19, 100=17.18, 1000=12.71, 10000=12.71 (USD)", RoHS=No, Stock=8278, Supplier=Mouser
R1 R3 R4 R6 R7 R8 R11: library part "RES; 10K; 0603; SMD; ESR03EZPF1002", "SMD Chip Resistor, 10 kOhm, ± 1%, 250 mW, 0603 [1608 Metric], Thick Film, Anti-Surge", Case Code (Imperial)=0603, Case Code (Metric)=1608, Manufacturer=Rohm, Manufacturer Part Number=ESR03EZPF1002, Max Operating Temperature=155°C, Max Power Dissipation=250mW, Min Operating Temperature=-55°C, Package Quantity=1, Ratings=AEC-Q200, Supplier Part Number=RHM10KADCT-ND, Temperature Coefficient=100ppm/°C, Tolerance=1%, Voltage Rating (DC)=150V, Case/Package=0603, Category="Chip SMD Resistors", ComponentLink1Description=https://datasheet.ciiva.com/2469/esr-2469710.pdf?src-supplier=Digikey, ComponentLink1URL=https://datasheet.ciiva.com/2469/esr-2469710.pdf?src-supplier=Digikey, ComponentLink2Description=https://datasheet.ciiva.com/2469/esr-2469711.pdf?src-supplier=Digikey, ComponentLink2URL=https://datasheet.ciiva.com/2469/esr-2469711.pdf?src-supplier=Digikey, ComponentLink3Description=https://datasheet.ciiva.com/2469/esr-2469709.pdf?src-supplier=Digikey, ComponentLink3URL=https://datasheet.ciiva.com/2469/esr-2469709.pdf?src-supplier=Digikey, ComponentLink4Description="Link Digikey", ComponentLink4URL=https://www.digikey.com/en/products/detail/rohm-semiconductor/ESR03EZPF1002/1983429, Designer=TVBac, Features="Automotive AEC-Q200", Height=0.022inch, Lead Free=5697LeadFree, Length=0.063inch, Number of Terminations=2, Packaging="Cut Tape", Power Rating=250mW, Pricing="1=0.16, 10=0.078, 50=0.0516, 100=0.044, 500=0.03138, 1000=0.02764 (USD)", RoHS=Yes, RoHS Compliant=Yes, Series=ESR, Stock=2136779, Supplier=Digikey, Width=0.031inch
  R4: Package=0603
R2: library part "RES; 100K; 0603; SMD; ESR03EZPJ104", "Res Thick Film 0603 100K Ohm 5% 0.25W(1/4W) ±200ppm/C Pad SMD Automotive T/R", Manufacturer=Rohm, Manufacturer Part Number=ESR03EZPJ104, Package=0603, Supplier Part Number=RHM100KDCT-ND, Voltage Rating=150V, Category="Chip SMD Resistors", ComponentLink1Description=https://datasheet.ciiva.com/14924/esr-14924811.pdf?src-supplier=Digikey, ComponentLink1URL=https://datasheet.ciiva.com/14924/esr-14924811.pdf?src-supplier=Digikey, ComponentLink2Description=https://datasheet.ciiva.com/14928/esr-14928813.pdf?src-supplier=Digikey, ComponentLink2URL=https://datasheet.ciiva.com/14928/esr-14928813.pdf?src-supplier=Digikey, ComponentLink3Description=https://datasheet.ciiva.com/14930/esr-14930633.pdf?src-supplier=Digikey, ComponentLink3URL=https://datasheet.ciiva.com/14930/esr-14930633.pdf?src-supplier=Digikey, ComponentLink4Description="Link Digikey", ComponentLink4URL=https://www.digikey.com/en/products/detail/rohm-semiconductor/ESR03EZPJ104/4051180, Designer=TVBac, Lead Free=5697LeadFree, Pricing="1=0.1, 10=0.048, 50=0.0312, 100=0.0265, 500=0.0188, 1000=0.0165 (USD)", RoHS=Yes, Stock=165361, Supplier=Digikey, Voltage Rating (DC)=150V
R5 R28: library part "RES; 0R; 0603; SMD;  RMCF0603ZT0R00", "Res Thick 0603 0 Ohm Jumper 1/10W 100Ppm/ C Smd Rohs Compliant: Yes", Case Code (Imperial)=0603, Case Code (Metric)=1608, Manufacturer="Stackpole Electronics", Manufacturer Part Number=RMCF0603ZT0R00, Max Operating Temperature=155°C, Max Power Dissipation=100mW, Min Operating Temperature=-55°C, Supplier Part Number=RMCF0603ZT0R00CT-ND, Voltage Rating=75V, Case/Package=0603, Category="Chip SMD Resistors", ComponentLink1Description=https://datasheet.octopart.com/RMCF0603ZT0R00-Stackpole-Electronics-datasheet-11547379.pdf?src-supplier=Future+Electronics, ComponentLink1URL=https://datasheet.octopart.com/RMCF0603ZT0R00-Stackpole-Electronics-datasheet-11547379.pdf?src-supplier=Future+Electronics, ComponentLink2Description=https://www.seielect.com/catalog/SEI-Packaging.pdf?src-supplier=Avnet, ComponentLink2URL=https://www.seielect.com/catalog/SEI-Packaging.pdf?src-supplier=Avnet, ComponentLink3Description=https://www.seielect.com/catalog/SEI-Packaging.pdf?src-supplier=Arrow+Electronics, ComponentLink3URL=https://www.seielect.com/catalog/SEI-Packaging.pdf?src-supplier=Arrow+Electronics, ComponentLink4Description=https://www.seielect.com/catalog/SEI-Packaging.pdf?src-supplier=Verical, ComponentLink4URL=https://www.seielect.com/catalog/SEI-Packaging.pdf?src-supplier=Verical, ComponentLink5Description=https://www.seielect.com/Catalog/SEI-RMCF_RMCP.pdf?src-supplier=Digikey, ComponentLink5URL=https://www.seielect.com/Catalog/SEI-RMCF_RMCP.pdf?src-supplier=Digikey, ComponentLink6Description=https://www.seielect.com/catalog/SEI-Packaging.pdf?src-supplier=Digikey, ComponentLink6URL=https://www.seielect.com/catalog/SEI-Packaging.pdf?src-supplier=Digikey, ComponentLink7Description=https://datasheet.octopart.com/RMCF0603ZT0R00-Stackpole-Electronics-datasheet-154799224.pdf?src-supplier=Master+Electronics, ComponentLink7URL=https://datasheet.octopart.com/RMCF0603ZT0R00-Stackpole-Electronics-datasheet-154799224.pdf?src-supplier=Master+Electronics, ComponentLink8Description="Link Digikey", ComponentLink8URL=https://www.digikey.com/en/products/detail/stackpole-electronics-inc/RMCF0603ZT0R00/1756908, Construction=Rectangular, Contact Plating=Tin,Matte, Depth=0.8mm, Designer=TVBac, Features="Automotive AEC-Q200", Height=0.022inch, Lead Free=5697LeadFree, Length=1.55mm, Military Standard=Not, Mounting Technology="Surface Mount", Number of Terminations=2, Package=0603, Packaging="Tape and Reel", Pricing="1=0.1, 10=0.013, 25=0.0096, 50=0.0072, 100=0.0051, 250=0.00408, 500=0.00328, 1000=0.00241, 5000=0.00173, 10000=0.0015, 25000=0.00132, 50000=0.00121, 125000=0.00118 (USD)", Radiation Hardening=No, RoHS=Yes, RoHS Compliant=Yes, Series=RMCF, Stock=5949380, Supplier=Digikey, Width=0.031inch
R9 R12 R13 R16 R17 R18 R20: library part "RES; 100R; 0603; SMD; KTR03EZPF1000", "Res Thick Film 0603 100 Ohm 1% 0.1W(1/10W) ±100ppm/C Pad SMD T/R Automotive AEC-Q200", Case Code (Imperial)=0603, Case Code (Metric)=1608, Manufacturer=Rohm, Manufacturer Part Number=KTR03EZPF1000, Max Operating Temperature=155°C, Max Power Dissipation=100mW, Min Operating Temperature=-55°C, Ratings=AEC-Q200, Supplier Part Number=755-KTR03EZPF1000, Temperature Coefficient=100ppm/°C, Tolerance=1%, Voltage Rating=350V, Case/Package=0603, Category="Chip SMD Resistors", ComponentLink1Description=https://datasheet.ciiva.com/14926/ktr-14926472.pdf?src-supplier=Digikey, ComponentLink1URL=https://datasheet.ciiva.com/14926/ktr-14926472.pdf?src-supplier=Digikey, ComponentLink2Description=https://datasheet.ciiva.com/14932/ktr-14932133.pdf?src-supplier=Digikey, ComponentLink2URL=https://datasheet.ciiva.com/14932/ktr-14932133.pdf?src-supplier=Digikey, ComponentLink3Description="Link Digikey", ComponentLink3URL=https://www.digikey.com/en/products/detail/rohm-semiconductor/KTR03EZPF1000/4051558, Designer=TVBac, Features="Automotive AEC-Q200", Number of Terminations=2, Packaging="Cut Tape", Pricing="1=0.12, 10=0.039, 50=0.039, 100=0.024, 1000=0.021, 10000=0.015 (USD)", RoHS=Yes, RoHS Compliant=Yes, Series=KTR, Stock=66325, Supplier=Mouser, Voltage Rating (DC)=350V
R10 R14 R19 R23: library part "RES; 1K; 0603; SMD; ESR03EZPF1001", "SMD Chip Resistor, 1 kOhm, ± 1%, 250 mW, 0603 [1608 Metric], Thick Film, Anti-Surge", Manufacturer=Rohm, Manufacturer Part Number=ESR03EZPF1001, Supplier Part Number=RHM1.00KADCT-ND, Voltage Rating=150V, Category="Chip SMD Resistors", ComponentLink1Description=https://datasheet.ciiva.com/2469/esr-2469712.pdf?src-supplier=Digikey, ComponentLink1URL=https://datasheet.ciiva.com/2469/esr-2469712.pdf?src-supplier=Digikey, ComponentLink2Description=https://datasheet.ciiva.com/2469/esr-2469713.pdf?src-supplier=Digikey, ComponentLink2URL=https://datasheet.ciiva.com/2469/esr-2469713.pdf?src-supplier=Digikey, ComponentLink3Description=https://datasheet.ciiva.com/2469/esr-2469714.pdf?src-supplier=Digikey, ComponentLink3URL=https://datasheet.ciiva.com/2469/esr-2469714.pdf?src-supplier=Digikey, ComponentLink4Description="Link Digikey", ComponentLink4URL=https://www.digikey.com/en/products/detail/rohm-semiconductor/ESR03EZPF1001/1983428, Designer=TVBac, Lead Free=5697LeadFree, Pricing="1=0.11, 10=0.055, 50=0.0364, 100=0.0309, 500=0.02206, 1000=0.01943 (USD)", RoHS=Yes, Stock=2703233, Supplier=Digikey, Voltage Rating (DC)=150V
R15 R21 R22: library part "RES; 4.7K; 0603; SMD; SFR03EZPF4701", "Res Anti-Sulfured Thick Film 0603 4.7k Ohm 1% 1/10W ±100ppm/°C Molded Paper T/R", Manufacturer=Rohm, Manufacturer Part Number=SFR03EZPF4701, Power Rating=100mW, Supplier Part Number=755-SFR03EZPF4701, Voltage Rating (DC)=50V, Category="Chip SMD Resistors", ComponentLink1Description=http://www.farnell.com/datasheets/2611943.pdf?src-supplier=Farnell, ComponentLink1URL=http://www.farnell.com/datasheets/2611943.pdf?src-supplier=Farnell, ComponentLink2Description=http://www.farnell.com/datasheets/2611943.pdf?src-supplier=Newark, ComponentLink2URL=http://www.farnell.com/datasheets/2611943.pdf?src-supplier=Newark, ComponentLink3Description=http://www.farnell.com/datasheets/2611943.pdf?src-supplier=Element14, ComponentLink3URL=http://www.farnell.com/datasheets/2611943.pdf?src-supplier=Element14, ComponentLink4Description=https://www.rohm.com/datasheet/SFR03EZPF/sfr-e?src-supplier=Digikey, ComponentLink4URL=https://www.rohm.com/datasheet/SFR03EZPF/sfr-e?src-supplier=Digikey, ComponentLink5Description="Link Digikey", ComponentLink5URL=https://www.digikey.com/en/products/detail/rohm-semiconductor/SFR03EZPF4701/9771855, Designer=TVBac, Pricing="1=0.14, 10=0.045, 50=0.045, 100=0.027, 1000=0.02, 10000=0.014 (USD)", RoHS=Yes, Stock=30180, Supplier=Mouser
R24 R25 R26 R27 R29 R30: library part "RES; 1K; 0603; SMD; ESR03EZPF1001", "SMD Chip Resistor, 1 kOhm, ± 1%, 250 mW, 0603 [1608 Metric], Thick Film, Anti-Surge", Manufacturer=Rohm, Manufacturer Part Number=ESR03EZPF1001, Package=0603, Supplier Part Number=RHM1.00KADCT-ND, Voltage Rating=150V, Category="Chip SMD Resistors", ComponentLink1Description=https://datasheet.ciiva.com/2469/esr-2469712.pdf?src-supplier=Digikey, ComponentLink1URL=https://datasheet.ciiva.com/2469/esr-2469712.pdf?src-supplier=Digikey, ComponentLink2Description=https://datasheet.ciiva.com/2469/esr-2469713.pdf?src-supplier=Digikey, ComponentLink2URL=https://datasheet.ciiva.com/2469/esr-2469713.pdf?src-supplier=Digikey, ComponentLink3Description=https://datasheet.ciiva.com/2469/esr-2469714.pdf?src-supplier=Digikey, ComponentLink3URL=https://datasheet.ciiva.com/2469/esr-2469714.pdf?src-supplier=Digikey, ComponentLink4Description="Link Digikey", ComponentLink4URL=https://www.digikey.com/en/products/detail/rohm-semiconductor/ESR03EZPF1001/1983428, Designer=TVBac, Lead Free=5697LeadFree, Pricing="1=0.11, 10=0.055, 50=0.0364, 100=0.0309, 500=0.02206, 1000=0.01943 (USD)", RoHS=Yes, Stock=2703233, Supplier=Digikey, Voltage Rating (DC)=150V
SW1: library part "BUT; SW; SMD; EVQ-P7L01P", "Tactile Switch SPST-NO Side Actuated Surface Mount, Right Angle", Package=None, Check_prices=https://www.snapeda.com/parts/EVQ-P7L01P/Panasonic+Electronic+Components/view-part/?ref=eda, Digi-Key_Part_Number=P16769TR-ND, MF="Panasonic Electronic Components", MP=EVQ-P7L01P, Purchase-URL=https://pricing.snapeda.com/search/part/EVQ-P7L01P/?ref=eda, SnapEDA_Link=https://www.snapeda.com/parts/EVQ-P7L01P/Panasonic+Electronic+Components/view-part/?ref=snap
SW3: library part "BUT; SW; SMD; PTS636SM50JSMTRLFS", "Switch Tactile N.O. SPST Rectangular Button J-Bend 0.05A 12VDC 1.77N SMD T/R", Contact Resistance=100mR, Manufacturer="ITT C&K", Manufacturer Part Number=PTS636SM50JSMTRLFS, Supplier Part Number=CKN12319-1-ND, Category="Tactile Switches", ComponentLink1Description="Link Digikey", ComponentLink1URL=https://www.digikey.com/en/products/detail/c-k/PTS636-SM50J-SMTR-LFS/10071732, Number of Positions=2NUMBER, Pricing="1=0.21, 10=0.199, 25=0.1888, 100=0.1717, 250=0.1614, 500=0.14766 (USD)", RoHS=No, Stock=80725, Supplier=Digikey
TP1 TP2 TP3 TP4 TP6 TP7 TP8 TP9 TP10 TP11 TP12: library part TEST_POINT
X1: library part "OSC; 3.58M; 3.579545M; ABLS-3.579545MHZ-B2-T", "Crystal 3.579545MHz ±20ppm (Tol) ±50ppm (Stability) 18pF FUND 180Ohm 2-Pin HC-49/US SMD T/R", Manufacturer=Abracon, Manufacturer Part Number=ABLS-3.579545MHZ-B2-T, Supplier Part Number=535-9081-1-ND, Category=Crystals, ComponentLink1Description=https://datasheet.ciiva.com/15116/getdatasheetpartid-719903-15116782.pdf?src-supplier=Verical, ComponentLink1URL=https://datasheet.ciiva.com/15116/getdatasheetpartid-719903-15116782.pdf?src-supplier=Verical, ComponentLink2Description=https://datasheet.ciiva.com/16410/abls-16410837.pdf?src-supplier=Future+Electronics, ComponentLink2URL=https://datasheet.ciiva.com/16410/abls-16410837.pdf?src-supplier=Future+Electronics, ComponentLink3Description=https://datasheet.ciiva.com/854/abls-854273.pdf?src-supplier=Digikey, ComponentLink3URL=https://datasheet.ciiva.com/854/abls-854273.pdf?src-supplier=Digikey, ComponentLink4Description=https://datasheet.ciiva.com/854/abls-854274.pdf?src-supplier=Digikey, ComponentLink4URL=https://datasheet.ciiva.com/854/abls-854274.pdf?src-supplier=Digikey, ComponentLink5Description=https://datasheet.ciiva.com/854/abls-854275.pdf?src-supplier=Digikey, ComponentLink5URL=https://datasheet.ciiva.com/854/abls-854275.pdf?src-supplier=Digikey, ComponentLink6Description=https://datasheet.ciiva.com/4945/abls-44621-4945006.pdf?src-supplier=Mouser, ComponentLink6URL=https://datasheet.ciiva.com/4945/abls-44621-4945006.pdf?src-supplier=Mouser, ComponentLink7Description=https://datasheet.ciiva.com/7998/abls-7998431.pdf?src-supplier=Element14, ComponentLink7URL=https://datasheet.ciiva.com/7998/abls-7998431.pdf?src-supplier=Element14, ComponentLink8Description="Link Digikey", ComponentLink8URL=https://www.digikey.com/en/products/detail/abracon-llc/ABLS-3-579545MHZ-B2-T/675276, Designer=TVBac, Pricing="1=0.27, 10=0.231, 50=0.208, 100=0.1989, 500=0.17934, 1000=0.17152, 2000=0.16407, 3000=0.15987, 5000=0.15474, 7000=0.15146, 10000=0.14806, 25000=0.13969, 50000=0.13369 (USD)", RoHS=Yes, Stock=16401, Supplier=Digikey
J2: Designer=TVBac, System=Connector

## Via types
v1: diameter 0.5, hole 0.3, Top Layer to Bottom Layer, tented both sides, 383 vias

## Nets (pads, with @x,y where several pads share a name; then routed paths per layer and width w, separated by ;. In a path a pad name is that pad's centre, name@x,y a point inside that pad or via, vN(x,y) a via of type N, cw(c..) or ccw(c..) an arc to the next point about the centre after c; other vN are vias at no path point)
3V3-ESP: C1.2 C3.2 C22.2 C23.2 IC1.4 J2.01 J2.02 M1.2 M2.5 M2.6 M2.7 R1.2 R3.1 R4.2 R6.1 TP4.1 | length 25
  Top Layer w0.15: R1.2 4.225,6.112 ; R4.2 1.529,0.838 1.616,0.926 1.616,1.342 1.795,1.521 2.779,1.521 3.391,2.133 3.391,3.214 4.271,4.093 4.271,4.642 4.225,4.687 4.225,6.112 ; C23.2 3.341,11.151 3.341,10.476 3.429,10.389 3.996,10.389 4.225,10.16 4.225,6.112 ; 4.227,8.302 4.24,8.288 7.1,8.288 ; R6.1 7.096,8.975 7.1,8.972 7.1,8.288 ; R3.1 8.199,8.975 8.225,8.95 8.225,8.415 8.099,8.288 7.1,8.288
  other v1: 36.132,-2.261 36.894,-2.261 36.132,-1.524 36.894,-1.524 36.132,-0.787 36.894,-0.787 3.341,13.866 21.375,14.3 21.959,14.3 22.543,14.3 21.375,14.935 21.959,14.935 22.543,14.935 3.442,16.332 3.442,16.942
5V-ESP: C4.2 C6.2 C19.2 IC1.3 IC3.1 IC3.2 J2.15 J2.16 J3.A4B9 J3.B4A9 R28.2
  other v1: 18.2,-2.108 18.708,-2.108 19.216,-2.108 18.2,-1.397 18.708,-1.397 19.216,-1.397 18.2,-0.686 18.708,-0.686 19.216,-0.686 2.096,0.559 2.503,0.559 2.096,0.965 2.503,0.965
ADE-C\S\: M1.7 R17.2 | length 1.5
  Top Layer w0.15: R17.2 M1.7
ADE-CF: M1.12 R11.2 R22.2 | length 24
  Top Layer w0.15: R22.2 4.865,6.806 v1(4.916,6.756)